# Altium PCB KCInput_Attenuator_V0.1.PcbDoc
Units mil, origin at the board's own origin, x right, y up, seen from the top; angles counter-clockwise.
Board outline 2200 x 1800 mil, 2 copper layers (Top Layer, Bottom Layer); 26 components, 27 nets, 77 pads, 0 vias.
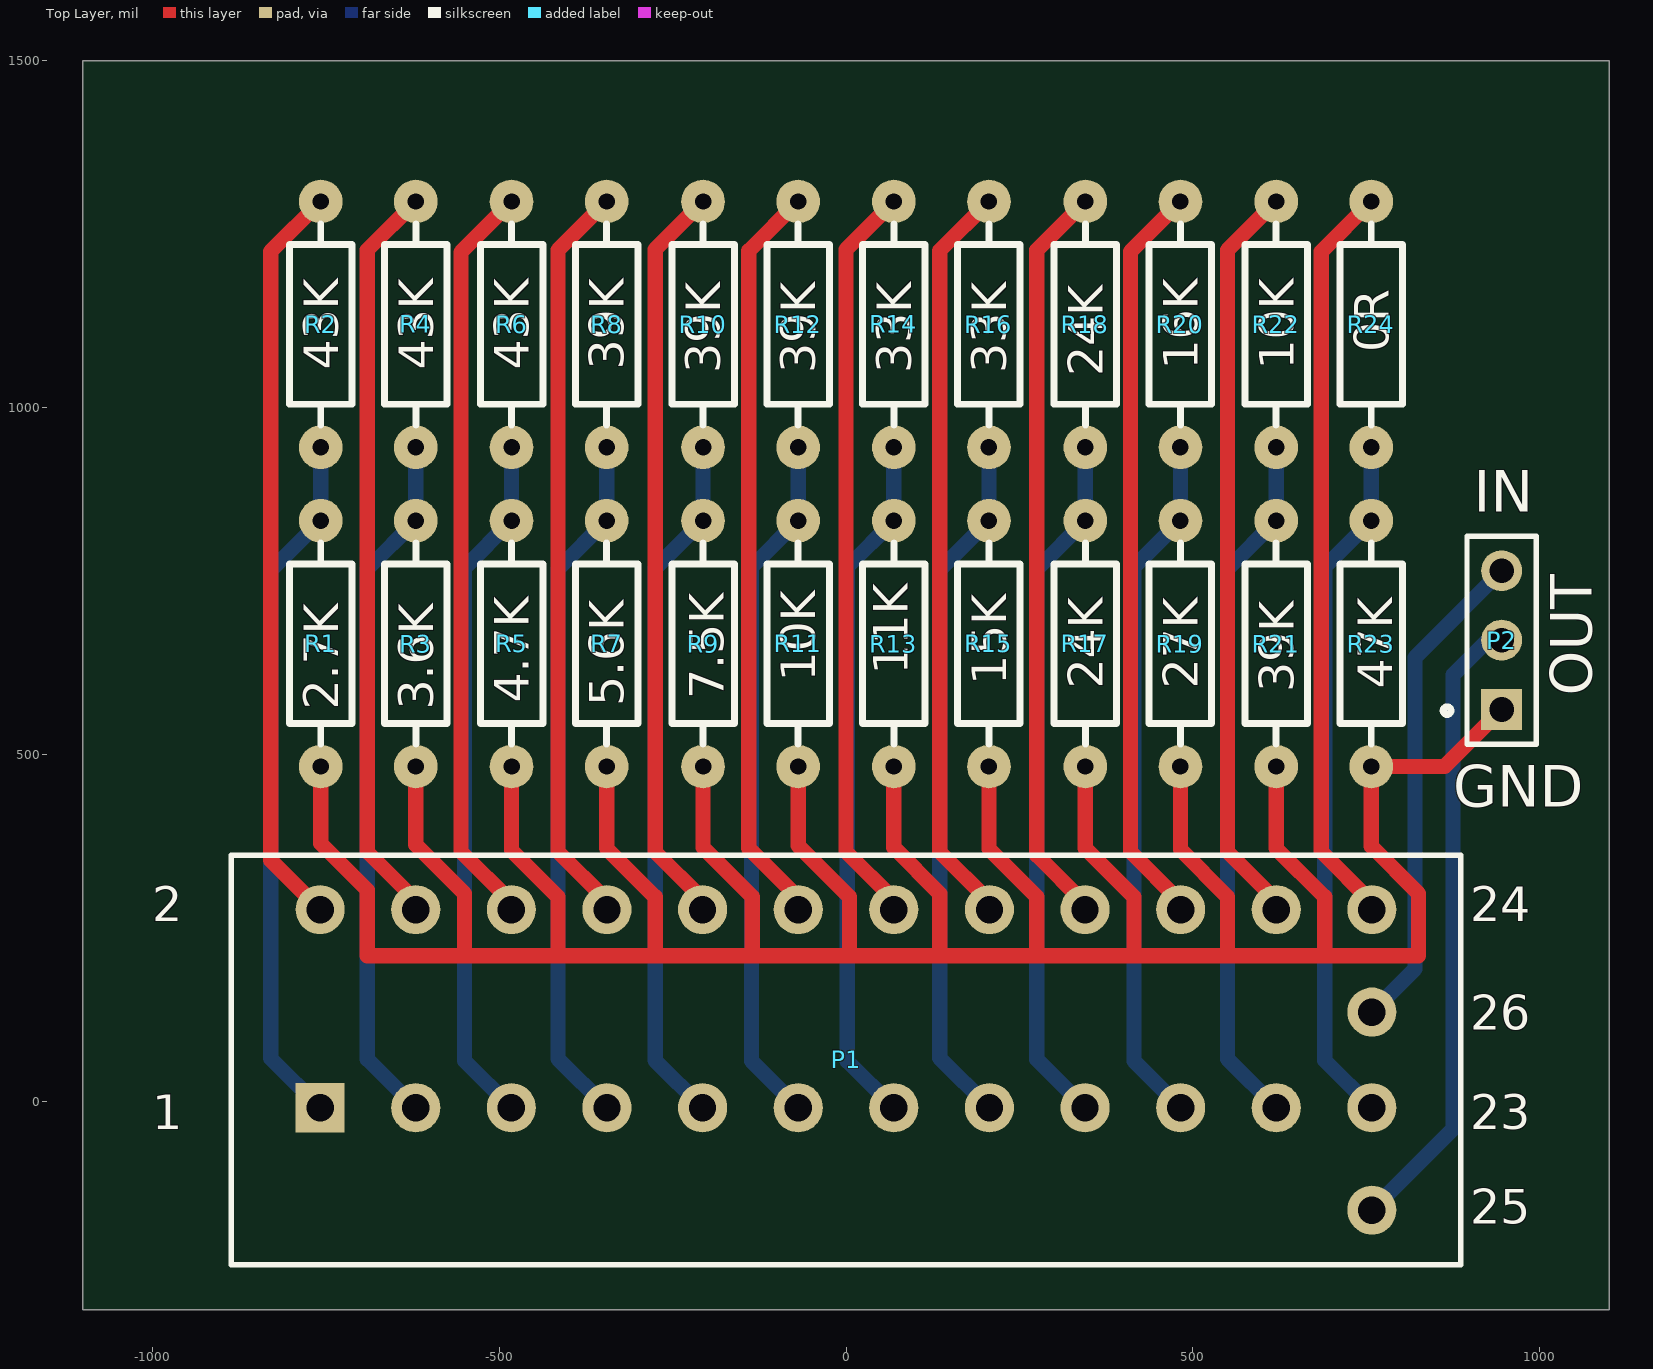
[diagram p0: Top Layer view]
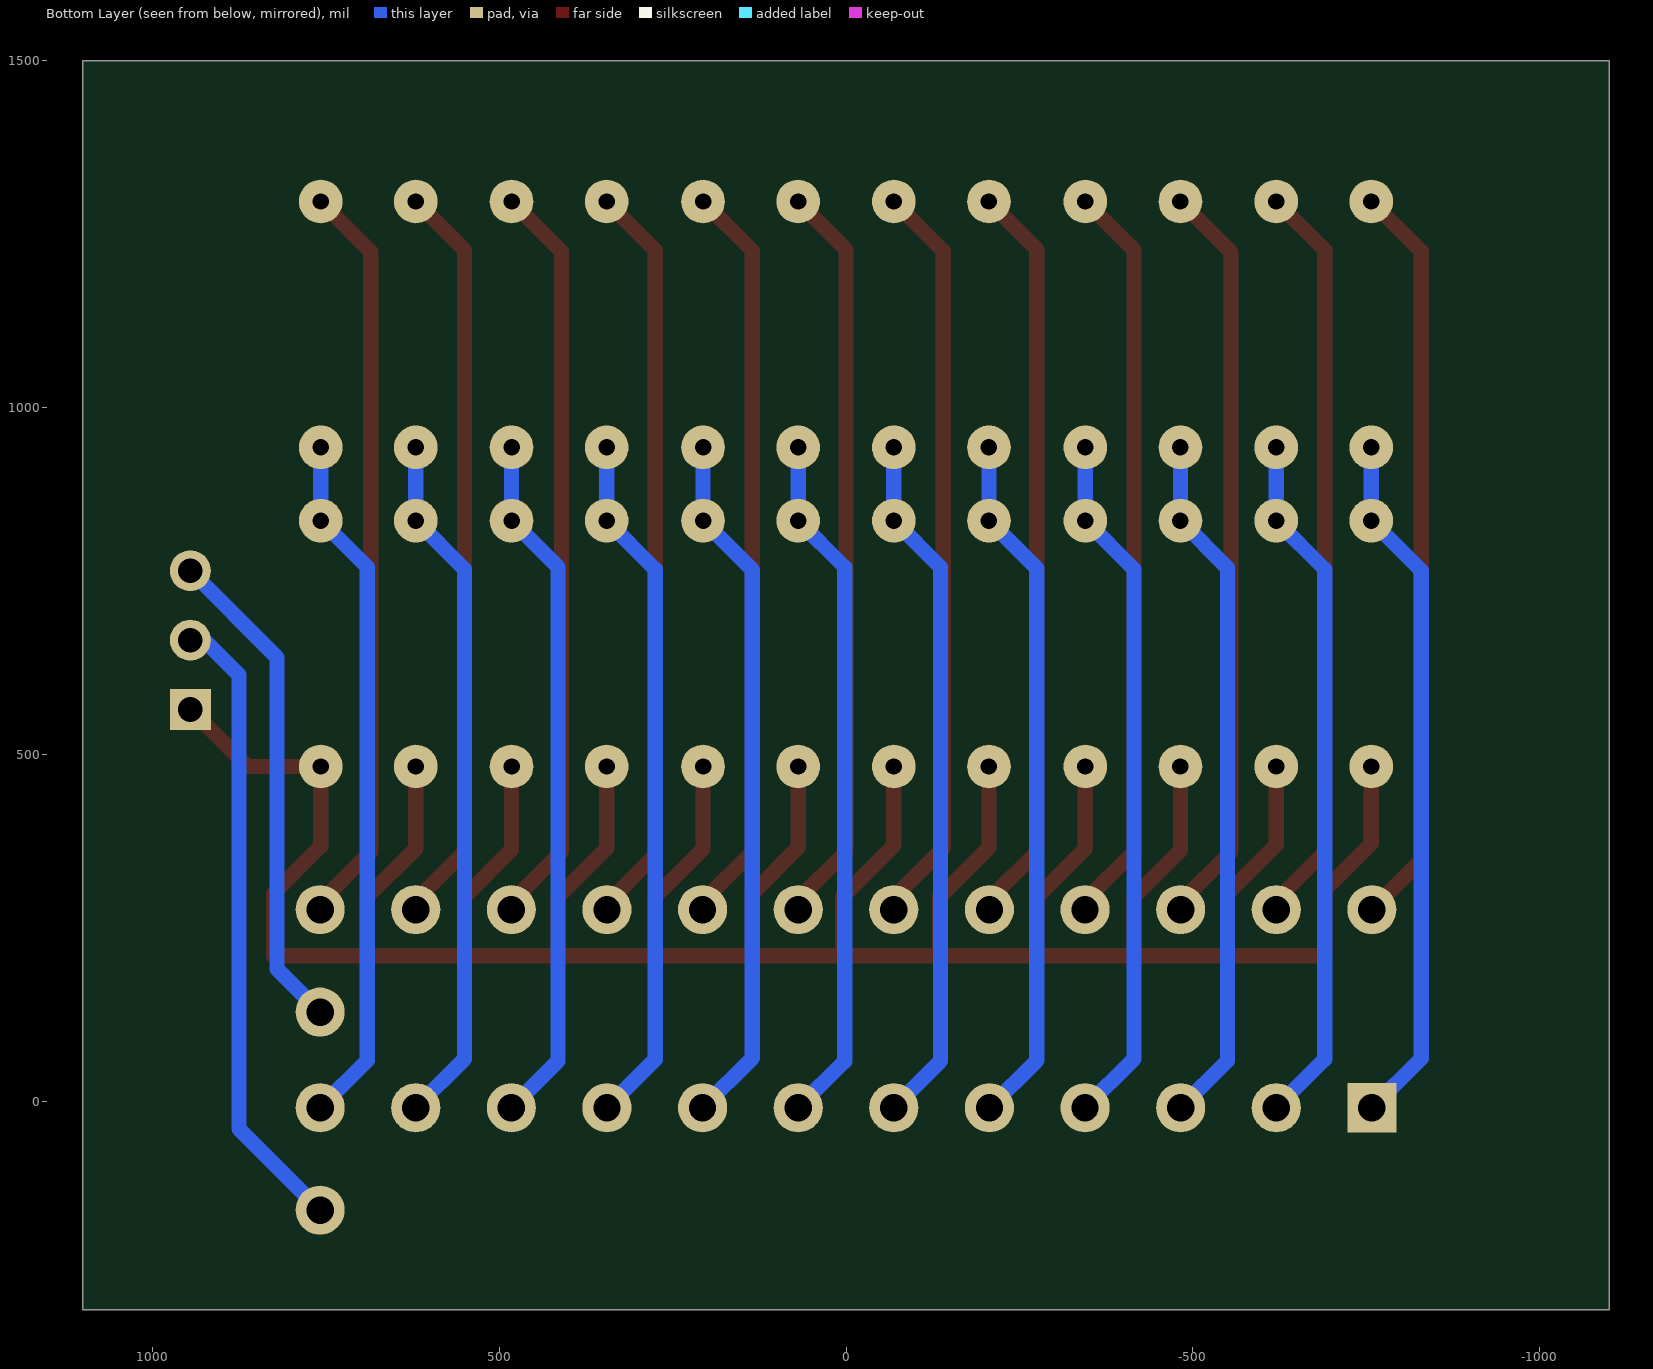
[diagram p1: Bottom Layer view, seen from below]
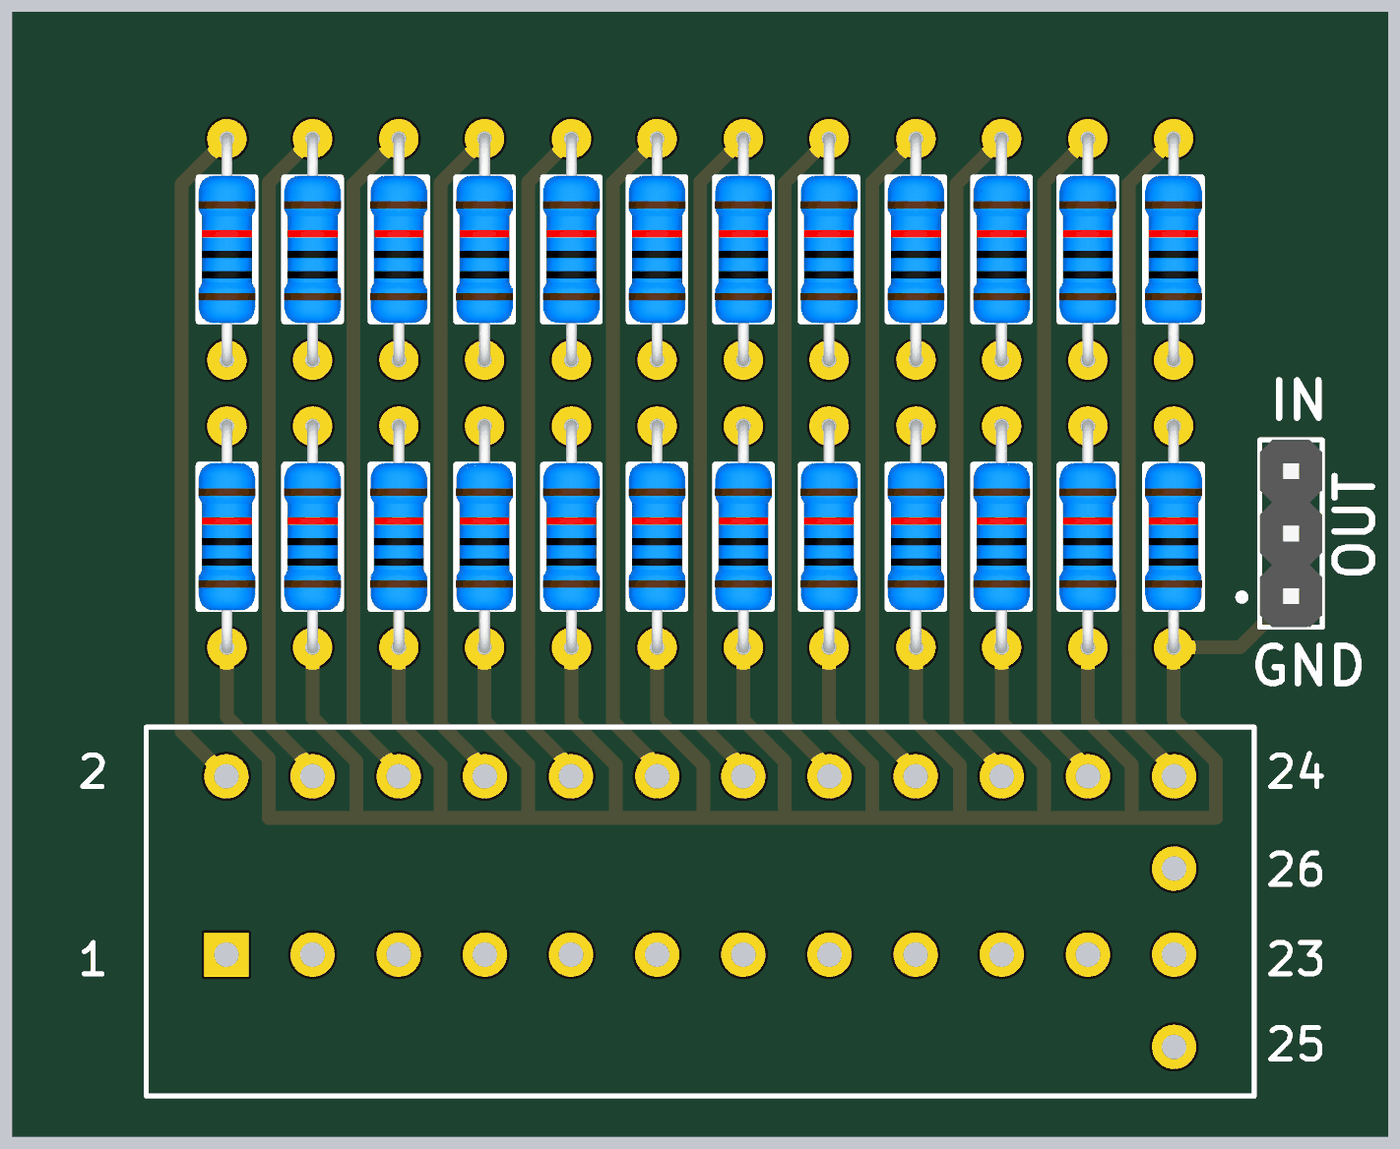
[diagram p2: 3D render of the assembled board from above, using the file's embedded part models]

## Layer stack, top to bottom
Top Solder: solder mask 0.4, Solder Resist, Dk 3.5
Top Layer: signal copper 1.4
Dielectric 1: dielectric 12.6, FR-4, Dk 4.8
Bottom Layer: signal copper 1.4
Bottom Solder: solder mask 0.4, Solder Resist, Dk 3.5

## Board outline
-1100,-300 1100,-300 1100,1500 -1100,1500

## Design rules (kind name [scope] priority, off if disabled: settings)
Clearance [All] p1: gap=10 ignorepadtopadclearanceinfootprint=FALSE except(0: Arc-Hole Track-Hole SMDPad-Hole THPad-Hole Via-Hole Fill-Hole Poly-Hole Region-Hole Text-Hole)
PolygonConnect [All] p1: connectstyle=Relief reliefconductorwidth=10 reliefentries=4 polygonreliefangle="90 Angle" airgapwidth=10
RoomDefinition KCInput_Attenuator_V0.1 [InComponentClass('KCInput_Attenuator_V0.1')] p1: confinementstyle=ConfineIn formatcopy=TRUE lockcomponents=FALSE outline 2910,-800 8560,-800 8560,1315 2910,1315
RoutingVias [All] p1: holewidth=28 width=50 viastyle="Through Hole" minholewidth=28 minwidth=50 maxholewidth=28 maxwidth=50
SolderMaskExpansion [All] p1: expansion=4
Width [All] p1: maxlimit=100 minlimit=10 preferedwidth=22
30 further rules are at their usual default settings.

## Components (designator, comment, footprint, x,y, rotation, side; value= is the part's Value field where it differs from the comment)
P1 "Attenuator_2X12+2" ATTENUATOR_2X13 0,60 r0 top
P2 "Header 3" HDR1X3 945,565 r90 top
R1 "2.7K" "RS 1/4W" -757,660 r90 top
R2 "43K" "RS 1/4W" -757,1120 r90 top
R3 "3.6K" "RS 1/4W" -620,660 r90 top
R4 "43K" "RS 1/4W" -620,1120 r90 top
R5 "4.7K" "RS 1/4W" -482,660 r90 top
R6 "43K" "RS 1/4W" -482,1120 r90 top
R7 "5.6K" "RS 1/4W" -345,660 r90 top
R8 "39K" "RS 1/4W" -345,1120 r90 top
R9 "7.5K" "RS 1/4W" -206,660 r90 top
R10 "39K" "RS 1/4W" -206,1120 r90 top
R11 "10K" "RS 1/4W" -69,660 r90 top
R12 "39K" "RS 1/4W" -69,1120 r90 top
R13 "11K" "RS 1/4W" 69,660 r90 top
R14 "33K" "RS 1/4W" 69,1120 r90 top
R15 "15K" "RS 1/4W" 206,660 r90 top
R16 "33K" "RS 1/4W" 206,1120 r90 top
R17 "24K" "RS 1/4W" 345,660 r90 top
R18 "24K" "RS 1/4W" 345,1120 r90 top
R19 "27K" "RS 1/4W" 482,660 r90 top
R20 "16K" "RS 1/4W" 482,1120 r90 top
R21 "39K" "RS 1/4W" 620,660 r90 top
R22 "10K" "RS 1/4W" 620,1120 r90 top
R23 "47K" "RS 1/4W" 757,660 r90 top
R24 "0R" "RS 1/4W" 757,1120 r90 top

## Footprints (in the part's own frame and the unit in brackets; to place one, negate y for a bottom-side part, rotate by r counter-clockwise, add the part's x,y. Pads: shape width x height; smd on the part's side, far side on the other; paste and mask are expansions set on the pad)
ATTENUATOR_2X13 [mm] "Connector; Header; 13x2 Position"
  rect 1.8x1.8 hole 1: 1(-19.25,-1.75)
  round 1.8 hole 1: 2(-19.25,5.5) 3(-15.75,-1.75) 4(-15.75,5.5) 5(-12.25,-1.75) 6(-12.25,5.5) 7(-8.75,-1.75) 8(-8.75,5.5) 9(-5.25,-1.75) 10(-5.25,5.5) 11(-1.75,-1.75) 12(-1.75,5.5) 13(1.75,-1.75) 14(1.75,5.5) 15(5.25,-1.75) 16(5.25,5.5) 17(8.75,-1.75) 18(8.75,5.5) 19(12.25,-1.75) 20(12.25,5.5) 21(15.75,-1.75) 22(15.75,5.5) 23(19.25,-1.75) 24(19.25,5.5) 25(19.25,-5.5) 26(19.25,1.75)
  silkscreen extent -22.5,-7.5 22.5,7.5
HDR1X3 [mm] "Connector; Header; 3 Position"
  rect 1.5x1.5 hole 0.9: 1(0,0)
  round 1.5 hole 0.9: 2(2.54,0) 3(5.08,0)
  silkscreen extent -1.27,-1.27 6.35,2.14, body extent -1.27,-1.27 6.35,1.27, height 8.54
"RS 1/4W" [mm] "直插色环电阻，脚距9mm，直径2.3mm"
  round 1.6 hole 0.6: 1(-4.5,0) 2(4.5,0)
  silkscreen extent -3.68,-1.14 3.68,1.14, body extent -4.72,-1.16 4.73,1.16, height 2.32

## Part data
P1: "Attenuator  12-Pin, Dual row, 2 Out", LatestRevisionDate=17-Jul-2002, LatestRevisionNote="Re-released for DXP Platform.", Publisher="Altium Limited"
P2: "Header, 3-Pin", LatestRevisionDate=17-Jul-2002, LatestRevisionNote="Re-released for DXP Platform.", Publisher="Altium Limited"
R1 R2 R3 R4 R5 R6 R7 R8 R9 R10 R11 R12 R13 R14 R15 R16 R17 R18 R19 R20 R21 R22 R23 R24: library part R-CRR, "直插色环电阻", BOM名称=色环电阻, 学习资源=www.ooocke.com, 版权归属=源创客

## Nets (pads, with @x,y where several pads share a name; then routed paths per layer and width w, separated by ;. In a path a pad name is that pad's centre, name@x,y a point inside that pad or via, vN(x,y) a via of type N, cw(c..) or ccw(c..) an arc to the next point about the centre after c; other vN are vias at no path point)
GND: P2.1 R1.1 R3.1 R5.1 R7.1 R9.1 R11.1 R13.1 R15.1 R17.1 R19.1 R21.1 R23.1 | length 5354.8
  Top Layer w22: R1.1 -757,372 -690,305 -690,210 -550,210 ; R3.1 -620,370 -550,300 -550,210 ; R5.1 -482,362 -415,295 -415,210 ; R7.1 -345,365 -275,295 -275,210 ; R9.1 -206,366 -135,295 -135,210 ; R11.1 -69,369 5,295 5,210 ; R13.1 69,366 135,300 135,210 ; R15.1 206,364 275,295 275,210 ; R17.1 345,365 415,295 415,210 ; R19.1 482,363 550,295 550,210 ; R21.1 620,365 690,295 690,210 ; P2.1 862.83,482.83 R23.1 757,368 825,300 825,210 690,210 ; -550,210 -415,210 ; -415,210 -275,210 ; -275,210 -135,210 ; -135,210 5,210 ; 5,210 135,210 ; 135,210 275,210 ; 275,210 415,210 ; 415,210 550,210 ; 550,210 690,210
NetP1_1: P1.1 R1.2 R2.1 | length 1011.2
  Bottom Layer w22: P1.1 -829.17,62.39 -829.17,765 R1.2 R2.1
NetP1_2: P1.2 R2.2 | length 1080.1
  Top Layer w22: P1.2 -829.17,347.83 -829.17,1225 R2.2
NetP1_3: P1.3 R3.2 R4.1 | length 1009.7
  Bottom Layer w22: P1.3 -690,61.02 -690,767.17 R3.2 R4.1
NetP1_4: P1.4 R4.2 | length 1078.6
  Top Layer w22: P1.4 -620.08,290.08 -690,360 -690,1227.17 R4.2
NetP1_5: P1.5 R5.2 R6.1 | length 1007.9
  Bottom Layer w22: P1.5 -550,58.82 -550,769.17 R5.2 R6.1
NetP1_6: P1.6 R6.2 | length 1081
  Top Layer w22: P1.6 -482.28,287.28 -555,360 -555,1224.17 R6.2
NetP1_7: P1.7 R7.2 R8.1 | length 1009.9
  Bottom Layer w22: R8.1 R7.2 -415,767.17 -415,61.61 P1.7
NetP1_8: P1.8 R8.2 | length 1078.8
  Top Layer w22: R8.2 -415,1227.17 -415,360 -344.49,289.49 P1.8
NetP1_9: P1.9 R9.2 R10.1 | length 1008.6
  Bottom Layer w22: P1.9 -275,59.41 -275,768.17 R9.2 R10.1
NetP1_10: P1.10 R10.2 | length 1077.5
  Top Layer w22: P1.10 -206.69,291.69 -275,360 -275,1228.17 R10.2
NetP1_11: P1.11 R11.2 R12.1 | length 1007.4
  Bottom Layer w22: R12.1 R11.2 -136.17,770 -136.17,58.37 P1.11
NetP1_12: P1.12 R12.2 | length 1079.5
  Top Layer w22: R12.2 -140,1226.17 -140,365 -68.9,293.9 P1.12
NetP1_13: P1.13 R13.2 R14.1 | length 1007.3
  Bottom Layer w22: P1.13 1.83,58.17 1.83,770 R13.2 R14.1
NetP1_14: P1.14 R14.2 | length 1077.7
  Top Layer w22: P1.14 68.9,291.1 0,360 0,1228.17 R14.2
NetP1_15: P1.15 R15.2 R16.1 | length 1010.8
  Bottom Layer w22: R16.1 R15.2 135,766.17 135,62.8 P1.15
NetP1_16: P1.16 R16.2 | length 1079.7
  Top Layer w22: R16.2 135,1226.17 135,360 206.69,288.31 P1.16
NetP1_17: P1.17 R17.2 R18.1 | length 1009.5
  Bottom Layer w22: P1.17 275,60.59 275,767.17 R17.2 R18.1
NetP1_18: P1.18 R18.2 | length 1078.4
  Top Layer w22: P1.18 344.49,285.51 275,355 275,1227.17 R18.2
NetP1_19: P1.19 R19.2 R20.1 | length 1007.4
  Bottom Layer w22: R20.1 R19.2 415,770.17 415,58.39 P1.19
NetP1_20: P1.20 R20.2 | length 1080.4
  Top Layer w22: R20.2 410,1225.17 410,360 482.28,287.72 P1.20
NetP1_21: P1.21 R21.2 R22.1 | length 1009.8
  Bottom Layer w22: R22.1 R21.2 550,767.17 550,61.18 P1.21
NetP1_22: P1.22 R22.2 | length 1078.7
  Top Layer w22: R22.2 550,1227.17 550,360 620.08,289.92 P1.22
NetP1_23: P1.23 R23.2 R24.1 | length 1007.6
  Bottom Layer w22: R24.1 R23.2 690,770.17 690,58.98 P1.23
NetP1_24: P1.24 R24.2 | length 1080.6
  Top Layer w22: R24.2 685,1225.17 685,360 757.87,287.13 P1.24
NetP1_25: P1.25 P2.2 | length 910.8
  Bottom Layer w22: P1.25 875,-39.41 875,615 925,665 P2.2
NetP1_26: P1.26 P2.3 | length 713.6
  Bottom Layer w22: P1.26 820,191.02 820,640 P2.3

## Silkscreen, mask and mechanical layers (free items; w line width, h text height)
Top Overlay:
  text "IN" at 905,850 h60
  text "OUT" at 1075,585 h60 r90
  text "GND" at 875,425 h60
Drill Drawing:
  the board outline again, w10

## Text inside footprints (layer, text, board x,y; h text height)
P1: Top Overlay "25" at 900,-176.22 h50; Top Overlay "26" at 900,103.31 h50; Top Overlay "1" at -1000,-40 h50; Top Overlay "2" at -1000,260 h50; Top Overlay "23" at 900,-40 h50; Top Overlay "24" at 900,260 h50